# Altium PCB PCB2.PcbDoc (part 3 of 7)
Units mm, origin at the board's own origin, x right, y up, seen from the top; angles counter-clockwise.
Board outline 49 x 45 mm, 6 copper layers (Component Side, GND1, 3.3V, 1.2V, GND2, Solder Side), stack 1.629 mm thick; 56 components, 116 nets, 925 pads, 478 vias.
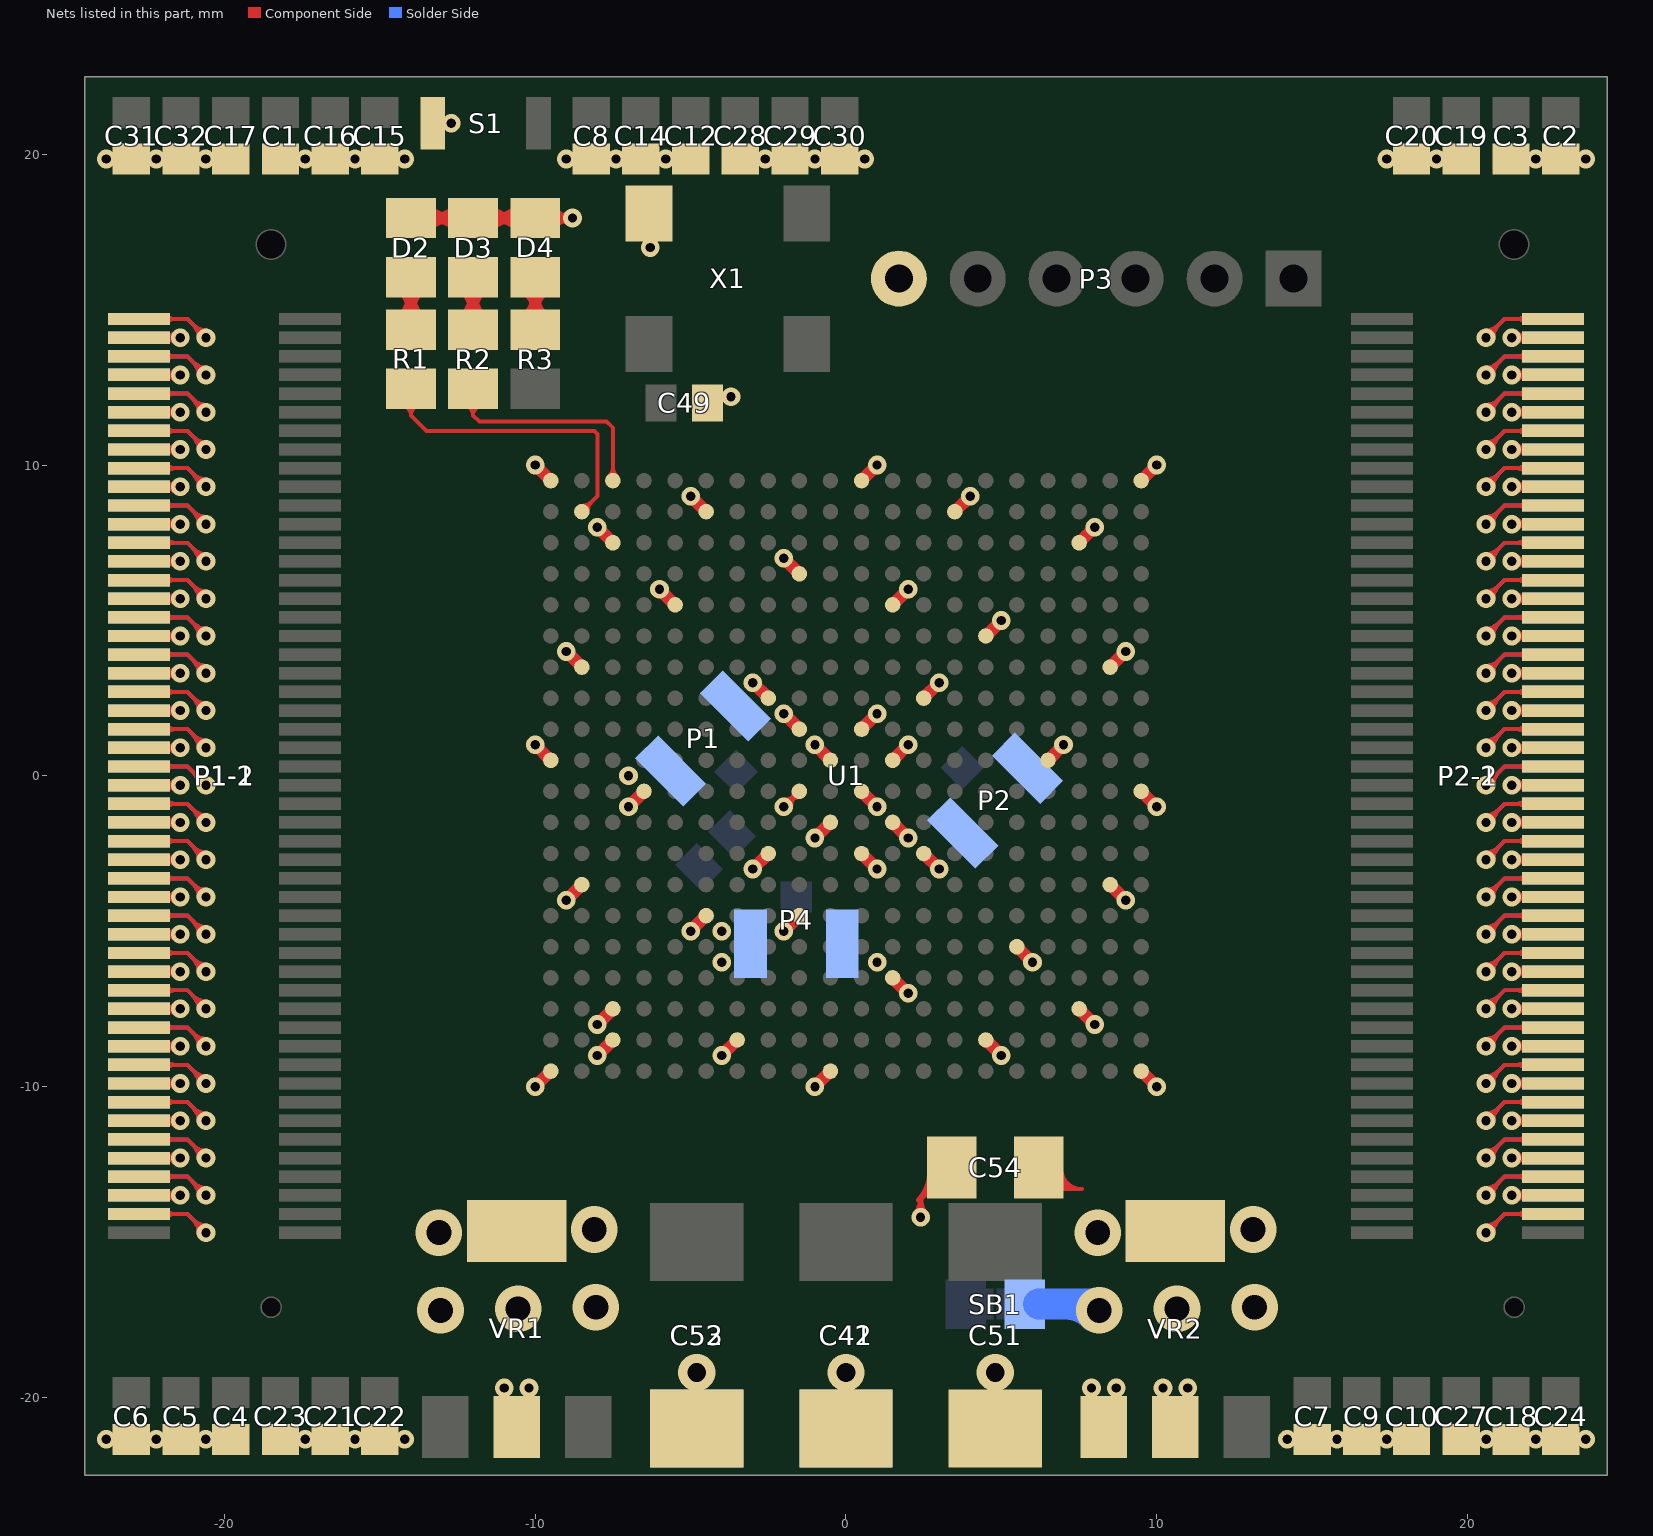
[diagram p7: the nets of this part, all layers, seen from the top]

## Via types
v1: diameter 0.6, hole 0.3, Component Side to Solder Side, tented both sides, 462 vias
v2: diameter 1.5, hole 0.8, Component Side to Solder Side, 10 vias
v3: diameter 1.2, hole 0.6, Component Side to Solder Side, 6 vias

## Nets (pads, with @x,y where several pads share a name; then routed paths per layer and width w, separated by ;. In a path a pad name is that pad's centre, name@x,y a point inside that pad or via, vN(x,y) a via of type N, cw(c..) or ccw(c..) an arc to the next point about the centre after c; other vN are vias at no path point) (continued)
GND: (continued)
  Solder Side w0.127: P1-2.97@-22.85,-14.2 P1-2.97@-22.75,-14.1 ; P1-2.97@-22.8,-14.1 P1-2.97@-22.75,-14.1 ; P1-2.95@-22.8,-13.5 P1-2.95@-22.75,-13.5 ; P1-2.93@-22.8,-12.9 P1-2.93@-22.75,-12.9 ; P1-2.91@-22.8,-12.3 P1-2.91@-22.75,-12.3 ; P1-2.89@-22.8,-11.7 P1-2.89@-22.75,-11.7 ; P1-2.85@-22.8,-10.5 P1-2.85@-22.75,-10.5 ; P1-2.77@-22.8,-8.1 P1-2.77@-22.75,-8.1 -21.196,-8.1 v1(-20.596,-8.7) ; P1-2.73@-22.8,-6.9 P1-2.73@-22.75,-6.9 -21.196,-6.9 v1(-20.596,-7.5) ; P1-2.65@-22.8,-4.5 P1-2.65@-22.75,-4.5 -21.196,-4.5 v1(-20.596,-5.1) ; P1-2.61@-22.8,-3.3 P1-2.61@-22.75,-3.3 -21.196,-3.3 v1(-20.596,-3.9) ; P1-2.53@-22.8,-0.9 P1-2.53@-22.75,-0.9 -21.196,-0.9 v1(-20.596,-1.5) ; P1-2.49@-22.8,0.3 P1-2.49@-22.75,0.3 -21.196,0.3 v1(-20.596,-0.3) ; P1-2.41@-22.8,2.7 P1-2.41@-22.75,2.7 -21.196,2.7 v1(-20.596,2.1) ; P1-2.37@-22.8,3.9 P1-2.37@-22.75,3.9 -21.196,3.9 v1(-20.596,3.3) ; P1-2.29@-22.8,6.3 P1-2.29@-22.75,6.3 -21.196,6.3 v1(-20.596,5.7) ; P1-2.25@-22.8,7.5 P1-2.25@-22.75,7.5 -21.196,7.5 v1(-20.596,6.9) ; P1-2.17@-22.8,9.9 P1-2.17@-22.75,9.9 -21.196,9.9 v1(-20.596,9.3) ; P1-2.13@-22.8,11.1 P1-2.13@-22.75,11.1 -21.196,11.1 v1(-20.596,10.5) ; P1-2.5@-22.8,13.5 P1-2.5@-22.75,13.5 -21.196,13.5 v1(-20.596,12.9) ; P1-2.1@-22.8,14.7 P1-2.1@-22.75,14.7 -21.196,14.7 v1(-20.596,14.1) ; P1-2.85@-22.75,-10.4 P1-2.85@-22.75,-10.5 ; P1-2.83@-22.75,-9.9 v1(-21.423,-9.9) v1@-21.323,-9.9 ; P1-2.81@-22.75,-9.3 -21.196,-9.3 v1(-20.596,-9.9) ; P1-2.79@-22.75,-8.7 v1(-21.423,-8.7) v1@-21.323,-8.7 ; P1-2.75@-22.75,-7.5 v1(-21.423,-7.5) v1@-21.323,-7.5 ; P1-2.71@-22.75,-6.3 v1(-21.423,-6.3) v1@-21.323,-6.3 ; P1-2.69@-22.75,-5.7 -21.196,-5.7 v1(-20.596,-6.3) ; P1-2.67@-22.75,-5.1 v1(-21.423,-5.1) v1@-21.323,-5.1 ; P1-2.63@-22.75,-3.9 v1(-21.423,-3.9) v1@-21.323,-3.9 ; P1-2.59@-22.75,-2.7 v1(-21.423,-2.7) v1@-21.323,-2.7 ; P1-2.57@-22.75,-2.1 -21.196,-2.1 v1(-20.596,-2.7) ; P1-2.55@-22.75,-1.5 v1(-21.423,-1.5) v1@-21.323,-1.5 ; P1-2.51@-22.75,-0.3 v1(-21.423,-0.3) v1@-21.323,-0.3 ; P1-2.47@-22.75,0.9 v1(-21.423,0.9) v1@-21.323,0.9 ; P1-2.45@-22.75,1.5 -21.196,1.5 v1(-20.596,0.9) ; P1-2.43@-22.75,2.1 v1(-21.423,2.1) v1@-21.323,2.1 ; P1-2.39@-22.75,3.3 v1(-21.423,3.3) v1@-21.323,3.3 ; P1-2.35@-22.75,4.5 v1(-21.423,4.5) v1@-21.323,4.5 ; P1-2.33@-22.75,5.1 -21.196,5.1 v1(-20.596,4.5) ; P1-2.31@-22.75,5.7 v1(-21.423,5.7) v1@-21.323,5.7 ; P1-2.27@-22.75,6.9 v1(-21.423,6.9) v1@-21.323,6.9 ; P1-2.23@-22.75,8.1 v1(-21.423,8.1) v1@-21.323,8.1 ; P1-2.21@-22.75,8.7 -21.196,8.7 v1(-20.596,8.1) ; P1-2.19@-22.75,9.3 v1(-21.423,9.3) v1@-21.323,9.3 ; P1-2.15@-22.75,10.5 v1(-21.423,10.5) v1@-21.323,10.5 ; P1-2.11@-22.75,11.7 v1(-21.423,11.7) v1@-21.323,11.7 ; P1-2.9@-22.75,12.3 -21.196,12.3 v1(-20.596,11.7) ; P1-2.7@-22.75,12.9 v1(-21.423,12.9) v1@-21.323,12.9 ; P1-2.3@-22.55,14.1 v1(-21.423,14.1) v1@-21.323,14.1 ; v1(-20.596,-14.7) -21.196,-14.1 P1-2.97@-22.75,-14.1 ; v1(20.596,-14.7) 21.196,-14.1 P2-2.98@22.75,-14.1 ; v1(20.596,-9.9) 21.196,-9.3 P2-2.82@22.75,-9.3 ; v1(20.596,-8.7) 21.196,-8.1 P2-2.78@22.75,-8.1 P2-2.78@22.8,-8.1 ; v1(20.596,-7.5) 21.196,-6.9 P2-2.74@22.75,-6.9 P2-2.74@22.8,-6.9 ; v1(20.596,-6.3) 21.196,-5.7 P2-2.70@22.75,-5.7 ; v1(20.596,-5.1) 21.196,-4.5 P2-2.66@22.75,-4.5 P2-2.66@22.8,-4.5 ; v1(20.596,-3.9) 21.196,-3.3 P2-2.62@22.75,-3.3 P2-2.62@22.8,-3.3 ; v1(20.596,-2.7) 21.196,-2.1 P2-2.58@22.75,-2.1 ; v1(20.596,-1.5) 21.196,-0.9 P2-2.54@22.75,-0.9 P2-2.54@22.8,-0.9 ; v1(20.596,-0.3) 21.196,0.3 P2-2.50@22.75,0.3 P2-2.50@22.8,0.3 ; v1(20.596,0.9) 21.196,1.5 P2-2.46@22.75,1.5 ; v1(20.596,2.1) 21.196,2.7 P2-2.42@22.75,2.7 P2-2.42@22.8,2.7 ; v1(20.596,3.3) 21.196,3.9 P2-2.38@22.75,3.9 P2-2.38@22.8,3.9 ; v1(20.596,4.5) 21.196,5.1 P2-2.34@22.75,5.1 ; v1(20.596,5.7) 21.196,6.3 P2-2.30@22.75,6.3 P2-2.30@22.8,6.3 ; v1(20.596,6.9) 21.196,7.5 P2-2.26@22.75,7.5 P2-2.26@22.8,7.5 ; v1(20.596,8.1) 21.196,8.7 P2-2.22@22.75,8.7 ; v1(20.596,9.3) 21.196,9.9 P2-2.18@22.75,9.9 P2-2.18@22.8,9.9 ; v1(20.596,10.5) 21.196,11.1 P2-2.14@22.75,11.1 P2-2.14@22.8,11.1 ; v1(20.596,11.7) 21.196,12.3 P2-2.10@22.75,12.3 ; v1(20.596,12.9) 21.196,13.5 P2-2.6@22.75,13.5 P2-2.6@22.8,13.5 ; v1(20.596,14.1) 21.196,14.7 P2-2.2@22.75,14.7 ; v1@21.323,-13.5 v1(21.423,-13.5) P2-2.96@22.75,-13.5 ; v1@21.323,-12.3 v1(21.423,-12.3) P2-2.92@22.75,-12.3 ; v1@21.323,-11.1 v1(21.423,-11.1) P2-2.88@22.75,-11.1 ; v1@21.323,-9.9 v1(21.423,-9.9) P2-2.84@22.75,-9.9 ; v1@21.323,-8.7 v1(21.423,-8.7) P2-2.80@22.75,-8.7 ; v1@21.323,-7.5 v1(21.423,-7.5) P2-2.76@22.75,-7.5 ; v1@21.323,-6.3 v1(21.423,-6.3) P2-2.72@22.75,-6.3 ; v1@21.323,-5.1 v1(21.423,-5.1) P2-2.68@22.75,-5.1 ; v1@21.323,-3.9 v1(21.423,-3.9) P2-2.64@22.75,-3.9 ; v1@21.323,-2.7 v1(21.423,-2.7) P2-2.60@22.75,-2.7 ; v1@21.323,-1.5 v1(21.423,-1.5) P2-2.56@22.75,-1.5 ; v1@21.323,-0.3 v1(21.423,-0.3) P2-2.52@22.75,-0.3 ; v1@21.323,0.9 v1(21.423,0.9) P2-2.48@22.75,0.9 ; v1@21.323,2.1 v1(21.423,2.1) P2-2.44@22.75,2.1 ; v1@21.323,3.3 v1(21.423,3.3) P2-2.40@22.75,3.3 ; v1@21.323,4.5 v1(21.423,4.5) P2-2.36@22.75,4.5 ; v1@21.323,5.7 v1(21.423,5.7) P2-2.32@22.75,5.7 ; v1@21.323,6.9 v1(21.423,6.9) P2-2.28@22.75,6.9 ; v1@21.323,8.1 v1(21.423,8.1) P2-2.24@22.75,8.1 ; v1@21.323,9.3 v1(21.423,9.3) P2-2.20@22.75,9.3 ; v1@21.323,10.5 v1(21.423,10.5) P2-2.16@22.75,10.5 ; v1@21.323,11.7 v1(21.423,11.7) P2-2.12@22.75,11.7 ; v1(21.423,12.9) P2-2.8@22.75,12.9 ; v1(21.423,14.1) P2-2.4@22.75,14.1 ; P2-2.86@22.75,-10.4 P2-2.86@22.75,-10.5 ; P2-2.98@22.8,-14.1 P2-2.98@22.75,-14.1 ; P2-2.94@22.8,-12.9 P2-2.94@22.75,-12.9 ; P2-2.90@22.8,-11.7 P2-2.90@22.75,-11.7 ; P2-2.98@22.85,-14.2 P2-2.98@22.75,-14.1 ; P1-2.95@-22.75,-13.5 v1(-21.423,-13.5) ; P1-2.95@-22.75,-13.5 v1(-21.423,-13.5) ; P1-2.93@-22.75,-12.9 -21.196,-12.9 ; P1-2.93@-22.75,-12.9 -21.196,-12.9 ; P1-2.91@-22.75,-12.3 v1(-21.423,-12.3) ; P1-2.91@-22.75,-12.3 v1(-21.423,-12.3) ; P1-2.89@-22.75,-11.7 -21.196,-11.7 ; P1-2.89@-22.75,-11.7 -21.196,-11.7 ; P1-2.85@-22.75,-10.5 -21.196,-10.5 ; P1-2.95@-21.994,-13.5 ccw(c-21.994,-12.929) v1@-21.59,-13.333 ; P1-2.95@-21.994,-13.5 cw(c-21.994,-14.071) v1@-21.59,-13.667 ; P1-2.95@-21.994,-13.5 ccw(c-21.994,-12.929) v1@-21.59,-13.333 ; P1-2.95@-21.994,-13.5 cw(c-21.994,-14.071) v1@-21.59,-13.667 ; P1-2.95@-21.994,-13.5 ccw(c-21.994,-12.929) v1@-21.59,-13.333 ; P1-2.95@-21.994,-13.5 cw(c-21.994,-14.071) v1@-21.59,-13.667 ; P1-2.95@-21.994,-13.5 ccw(c-21.994,-12.929) v1@-21.59,-13.333 ; P1-2.95@-21.994,-13.5 cw(c-21.994,-14.071) v1@-21.59,-13.667 ; P1-2.91@-21.994,-12.3 ccw(c-21.994,-11.729) v1@-21.59,-12.133 ; P1-2.91@-21.994,-12.3 cw(c-21.994,-12.871) v1@-21.59,-12.467 ; P1-2.91@-21.994,-12.3 ccw(c-21.994,-11.729) v1@-21.59,-12.133 ; P1-2.91@-21.994,-12.3 cw(c-21.994,-12.871) v1@-21.59,-12.467 ; P1-2.91@-21.994,-12.3 ccw(c-21.994,-11.729) v1@-21.59,-12.133 ; P1-2.91@-21.994,-12.3 cw(c-21.994,-12.871) v1@-21.59,-12.467 ; P1-2.91@-21.994,-12.3 ccw(c-21.994,-11.729) v1@-21.59,-12.133 ; P1-2.91@-21.994,-12.3 cw(c-21.994,-12.871) v1@-21.59,-12.467 ; P1-2.87@-21.994,-11.1 ccw(c-21.994,-10.529) v1@-21.59,-10.933 ; P1-2.87@-21.994,-11.1 cw(c-21.994,-11.671) v1@-21.59,-11.267 ; P1-2.87@-21.994,-11.1 ccw(c-21.994,-10.529) v1@-21.59,-10.933 ; P1-2.87@-21.994,-11.1 cw(c-21.994,-11.671) v1@-21.59,-11.267 ; P1-2.87@-21.994,-11.1 ccw(c-21.994,-10.529) v1@-21.59,-10.933 ; P1-2.87@-21.994,-11.1 cw(c-21.994,-11.671) v1@-21.59,-11.267 ; P1-2.87@-21.994,-11.1 ccw(c-21.994,-10.529) v1@-21.59,-10.933 ; P1-2.87@-21.994,-11.1 cw(c-21.994,-11.671) v1@-21.59,-11.267 ; P1-2.83@-21.994,-9.9 ccw(c-21.994,-9.329) -21.59,-9.733 cw(c-21.994,-9.329) P1-2.83@-21.994,-9.9 ; P1-2.83@-21.994,-9.9 cw(c-21.994,-10.471) -21.59,-10.067 ccw(c-21.994,-10.471) P1-2.83@-21.994,-9.9 ; P1-2.79@-21.994,-8.7 ccw(c-21.994,-8.129) -21.59,-8.533 cw(c-21.994,-8.129) P1-2.79@-21.994,-8.7 ; P1-2.79@-21.994,-8.7 cw(c-21.994,-9.271) -21.59,-8.867 ccw(c-21.994,-9.271) P1-2.79@-21.994,-8.7 ; P1-2.75@-21.994,-7.5 ccw(c-21.994,-6.929) -21.59,-7.333 cw(c-21.994,-6.929) P1-2.75@-21.994,-7.5 ; P1-2.75@-21.994,-7.5 cw(c-21.994,-8.071) -21.59,-7.667 ccw(c-21.994,-8.071) P1-2.75@-21.994,-7.5 ; P1-2.71@-21.994,-6.3 ccw(c-21.994,-5.729) -21.59,-6.133 cw(c-21.994,-5.729) P1-2.71@-21.994,-6.3 ; P1-2.71@-21.994,-6.3 cw(c-21.994,-6.871) -21.59,-6.467 ccw(c-21.994,-6.871) P1-2.71@-21.994,-6.3 ; P1-2.67@-21.994,-5.1 ccw(c-21.994,-4.529) -21.59,-4.933 cw(c-21.994,-4.529) P1-2.67@-21.994,-5.1 ; P1-2.67@-21.994,-5.1 cw(c-21.994,-5.671) -21.59,-5.267 ccw(c-21.994,-5.671) P1-2.67@-21.994,-5.1 ; P1-2.63@-21.994,-3.9 ccw(c-21.994,-3.329) -21.59,-3.733 cw(c-21.994,-3.329) P1-2.63@-21.994,-3.9 ; P1-2.63@-21.994,-3.9 cw(c-21.994,-4.471) -21.59,-4.067 ccw(c-21.994,-4.471) P1-2.63@-21.994,-3.9 ; P1-2.59@-21.994,-2.7 ccw(c-21.994,-2.129) -21.59,-2.533 cw(c-21.994,-2.129) P1-2.59@-21.994,-2.7 ; P1-2.59@-21.994,-2.7 cw(c-21.994,-3.271) -21.59,-2.867 ccw(c-21.994,-3.271) P1-2.59@-21.994,-2.7 ; P1-2.55@-21.994,-1.5 ccw(c-21.994,-0.929) -21.59,-1.333 cw(c-21.994,-0.929) P1-2.55@-21.994,-1.5 ; P1-2.55@-21.994,-1.5 cw(c-21.994,-2.071) -21.59,-1.667 ccw(c-21.994,-2.071) P1-2.55@-21.994,-1.5 ; P1-2.51@-21.994,-0.3 ccw(c-21.994,0.271) -21.59,-0.133 cw(c-21.994,0.271) P1-2.51@-21.994,-0.3 ; P1-2.51@-21.994,-0.3 cw(c-21.994,-0.871) -21.59,-0.467 ccw(c-21.994,-0.871) P1-2.51@-21.994,-0.3 ; P1-2.47@-21.994,0.9 ccw(c-21.994,1.471) -21.59,1.067 cw(c-21.994,1.471) P1-2.47@-21.994,0.9 ; P1-2.47@-21.994,0.9 cw(c-21.994,0.329) -21.59,0.733 ccw(c-21.994,0.329) P1-2.47@-21.994,0.9 ; P1-2.43@-21.994,2.1 ccw(c-21.994,2.671) -21.59,2.267 cw(c-21.994,2.671) P1-2.43@-21.994,2.1 ; P1-2.43@-21.994,2.1 cw(c-21.994,1.529) -21.59,1.933 ccw(c-21.994,1.529) P1-2.43@-21.994,2.1 ; P1-2.39@-21.994,3.3 ccw(c-21.994,3.871) -21.59,3.467 cw(c-21.994,3.871) P1-2.39@-21.994,3.3 ; P1-2.39@-21.994,3.3 cw(c-21.994,2.729) -21.59,3.133 ccw(c-21.994,2.729) P1-2.39@-21.994,3.3 ; P1-2.35@-21.994,4.5 ccw(c-21.994,5.071) -21.59,4.667 cw(c-21.994,5.071) P1-2.35@-21.994,4.5 ; P1-2.35@-21.994,4.5 cw(c-21.994,3.929) -21.59,4.333 ccw(c-21.994,3.929) P1-2.35@-21.994,4.5 ; P1-2.31@-21.994,5.7 ccw(c-21.994,6.271) -21.59,5.867 cw(c-21.994,6.271) P1-2.31@-21.994,5.7 ; P1-2.31@-21.994,5.7 cw(c-21.994,5.129) -21.59,5.533 ccw(c-21.994,5.129) P1-2.31@-21.994,5.7 ; P1-2.27@-21.994,6.9 ccw(c-21.994,7.471) -21.59,7.067 cw(c-21.994,7.471) P1-2.27@-21.994,6.9 ; P1-2.27@-21.994,6.9 cw(c-21.994,6.329) -21.59,6.733 ccw(c-21.994,6.329) P1-2.27@-21.994,6.9 ; P1-2.23@-21.994,8.1 ccw(c-21.994,8.671) -21.59,8.267 cw(c-21.994,8.671) P1-2.23@-21.994,8.1 ; P1-2.23@-21.994,8.1 cw(c-21.994,7.529) -21.59,7.933 ccw(c-21.994,7.529) P1-2.23@-21.994,8.1 ; P1-2.19@-21.994,9.3 ccw(c-21.994,9.871) -21.59,9.467 cw(c-21.994,9.871) P1-2.19@-21.994,9.3 ; P1-2.19@-21.994,9.3 cw(c-21.994,8.729) -21.59,9.133 ccw(c-21.994,8.729) P1-2.19@-21.994,9.3 ; P1-2.15@-21.994,10.5 ccw(c-21.994,11.071) -21.59,10.667 cw(c-21.994,11.071) P1-2.15@-21.994,10.5 ; P1-2.15@-21.994,10.5 cw(c-21.994,9.929) -21.59,10.333 ccw(c-21.994,9.929) P1-2.15@-21.994,10.5 ; P1-2.11@-21.994,11.7 ccw(c-21.994,12.271) -21.59,11.867 cw(c-21.994,12.271) P1-2.11@-21.994,11.7 ; P1-2.11@-21.994,11.7 cw(c-21.994,11.129) -21.59,11.533 ccw(c-21.994,11.129) P1-2.11@-21.994,11.7 ; P1-2.7@-21.994,12.9 ccw(c-21.994,13.471) -21.59,13.067 cw(c-21.994,13.471) P1-2.7@-21.994,12.9 ; P1-2.7@-21.994,12.9 cw(c-21.994,12.329) -21.59,12.733 ccw(c-21.994,12.329) P1-2.7@-21.994,12.9 ; P1-2.3@-21.994,14.1 ccw(c-21.994,14.671) -21.59,14.267 cw(c-21.994,14.671) P1-2.3@-21.994,14.1 ; P1-2.3@-21.994,14.1 cw(c-21.994,13.529) -21.59,13.933 ccw(c-21.994,13.529) P1-2.3@-21.994,14.1 ; P1-2.95@-21.853,-13.597 cw(c-21.62,-13.83) v1@-21.62,-13.5 ; P1-2.95@-21.853,-13.597 cw(c-21.62,-13.83) v1@-21.62,-13.5 ; P1-2.95@-21.853,-13.597 cw(c-21.62,-13.83) v1@-21.62,-13.5 ; P1-2.95@-21.853,-13.597 cw(c-21.62,-13.83) v1@-21.62,-13.5 ; P1-2.95@-21.853,-13.403 ccw(c-21.62,-13.17) v1@-21.62,-13.5 ; P1-2.95@-21.853,-13.403 ccw(c-21.62,-13.17) v1@-21.62,-13.5 ; P1-2.95@-21.853,-13.403 ccw(c-21.62,-13.17) v1@-21.62,-13.5 ; P1-2.95@-21.853,-13.403 ccw(c-21.62,-13.17) v1@-21.62,-13.5 ; P1-2.93@-21.853,-12.997 cw(c-21.62,-13.23) -21.62,-12.9 ; P1-2.93@-21.853,-12.997 cw(c-21.62,-13.23) -21.62,-12.9 ; P1-2.93@-21.853,-12.997 cw(c-21.62,-13.23) -21.62,-12.9 ; P1-2.93@-21.853,-12.997 cw(c-21.62,-13.23) -21.62,-12.9 ; P1-2.93@-21.853,-12.803 ccw(c-21.62,-12.57) -21.62,-12.9 ; P1-2.93@-21.853,-12.803 ccw(c-21.62,-12.57) -21.62,-12.9 ; P1-2.93@-21.853,-12.803 ccw(c-21.62,-12.57) -21.62,-12.9 ; P1-2.93@-21.853,-12.803 ccw(c-21.62,-12.57) -21.62,-12.9 ; P1-2.91@-21.853,-12.397 cw(c-21.62,-12.63) v1@-21.62,-12.3 ; P1-2.91@-21.853,-12.397 cw(c-21.62,-12.63) v1@-21.62,-12.3 ; P1-2.91@-21.853,-12.397 cw(c-21.62,-12.63) v1@-21.62,-12.3 ; P1-2.91@-21.853,-12.397 cw(c-21.62,-12.63) v1@-21.62,-12.3 ; P1-2.91@-21.853,-12.203 ccw(c-21.62,-11.97) v1@-21.62,-12.3 ; P1-2.91@-21.853,-12.203 ccw(c-21.62,-11.97) v1@-21.62,-12.3 ; P1-2.91@-21.853,-12.203 ccw(c-21.62,-11.97) v1@-21.62,-12.3 ; P1-2.91@-21.853,-12.203 ccw(c-21.62,-11.97) v1@-21.62,-12.3 ; P1-2.89@-21.853,-11.797 cw(c-21.62,-12.03) -21.62,-11.7 ; P1-2.89@-21.853,-11.797 cw(c-21.62,-12.03) -21.62,-11.7 ; P1-2.89@-21.853,-11.797 cw(c-21.62,-12.03) -21.62,-11.7 ; P1-2.89@-21.853,-11.797 cw(c-21.62,-12.03) -21.62,-11.7 ; P1-2.89@-21.853,-11.603 ccw(c-21.62,-11.37) -21.62,-11.7 ; P1-2.89@-21.853,-11.603 ccw(c-21.62,-11.37) -21.62,-11.7 ; P1-2.89@-21.853,-11.603 ccw(c-21.62,-11.37) -21.62,-11.7 ; P1-2.89@-21.853,-11.603 ccw(c-21.62,-11.37) -21.62,-11.7 ; P1-2.87@-21.853,-11.197 cw(c-21.62,-11.43) v1@-21.62,-11.1 ; P1-2.87@-21.853,-11.197 cw(c-21.62,-11.43) v1@-21.62,-11.1 ; P1-2.87@-21.853,-11.197 cw(c-21.62,-11.43) v1@-21.62,-11.1 ; P1-2.87@-21.853,-11.197 cw(c-21.62,-11.43) v1@-21.62,-11.1 ; P1-2.87@-21.853,-11.003 ccw(c-21.62,-10.77) v1@-21.62,-11.1 ; P1-2.87@-21.853,-11.003 ccw(c-21.62,-10.77) v1@-21.62,-11.1 ; P1-2.87@-21.853,-11.003 ccw(c-21.62,-10.77) v1@-21.62,-11.1 ; P1-2.87@-21.853,-11.003 ccw(c-21.62,-10.77) v1@-21.62,-11.1 ; -21.62,-14.1 ccw(c-21.62,-14.43) -21.853,-14.197 cw(c-21.62,-14.43) -21.62,-14.1 ; -21.62,-14.1 cw(c-21.62,-13.77) -21.853,-14.003 ccw(c-21.62,-13.77) -21.62,-14.1 ; -21.62,-10.5 ccw(c-21.62,-10.83) -21.853,-10.597 cw(c-21.62,-10.83) -21.62,-10.5 ; -21.62,-10.5 cw(c-21.62,-10.17) -21.853,-10.403 ccw(c-21.62,-10.17) -21.62,-10.5 ; v1@-21.62,-9.9 ccw(c-21.62,-10.23) -21.853,-9.997 cw(c-21.62,-10.23) v1@-21.62,-9.9 ; v1@-21.62,-9.9 cw(c-21.62,-9.57) -21.853,-9.803 ccw(c-21.62,-9.57) v1@-21.62,-9.9 ; -21.62,-9.3 ccw(c-21.62,-9.63) -21.853,-9.397 cw(c-21.62,-9.63) -21.62,-9.3 ; -21.62,-9.3 cw(c-21.62,-8.97) -21.853,-9.203 ccw(c-21.62,-8.97) -21.62,-9.3 ; v1@-21.62,-8.7 ccw(c-21.62,-9.03) -21.853,-8.797 cw(c-21.62,-9.03) v1@-21.62,-8.7 ; v1@-21.62,-8.7 cw(c-21.62,-8.37) -21.853,-8.603 ccw(c-21.62,-8.37) v1@-21.62,-8.7 ; -21.62,-8.1 ccw(c-21.62,-8.43) -21.853,-8.197 cw(c-21.62,-8.43) -21.62,-8.1 ; -21.62,-8.1 cw(c-21.62,-7.77) -21.853,-8.003 ccw(c-21.62,-7.77) -21.62,-8.1 ; v1@-21.62,-7.5 ccw(c-21.62,-7.83) -21.853,-7.597 cw(c-21.62,-7.83) v1@-21.62,-7.5 ; v1@-21.62,-7.5 cw(c-21.62,-7.17) -21.853,-7.403 ccw(c-21.62,-7.17) v1@-21.62,-7.5 ; -21.62,-6.9 ccw(c-21.62,-7.23) -21.853,-6.997 cw(c-21.62,-7.23) -21.62,-6.9 ; -21.62,-6.9 cw(c-21.62,-6.57) -21.853,-6.803 ccw(c-21.62,-6.57) -21.62,-6.9 ; v1@-21.62,-6.3 ccw(c-21.62,-6.63) -21.853,-6.397 cw(c-21.62,-6.63) v1@-21.62,-6.3 ; v1@-21.62,-6.3 cw(c-21.62,-5.97) -21.853,-6.203 ccw(c-21.62,-5.97) v1@-21.62,-6.3 ; -21.62,-5.7 ccw(c-21.62,-6.03) -21.853,-5.797 cw(c-21.62,-6.03) -21.62,-5.7 ; -21.62,-5.7 cw(c-21.62,-5.37) -21.853,-5.603 ccw(c-21.62,-5.37) -21.62,-5.7 ; v1@-21.62,-5.1 ccw(c-21.62,-5.43) -21.853,-5.197 cw(c-21.62,-5.43) v1@-21.62,-5.1 ; v1@-21.62,-5.1 cw(c-21.62,-4.77) -21.853,-5.003 ccw(c-21.62,-4.77) v1@-21.62,-5.1 ; -21.62,-4.5 ccw(c-21.62,-4.83) -21.853,-4.597 cw(c-21.62,-4.83) -21.62,-4.5 ; -21.62,-4.5 cw(c-21.62,-4.17) -21.853,-4.403 ccw(c-21.62,-4.17) -21.62,-4.5 ; v1@-21.62,-3.9 ccw(c-21.62,-4.23) -21.853,-3.997 cw(c-21.62,-4.23) v1@-21.62,-3.9 ; v1@-21.62,-3.9 cw(c-21.62,-3.57) -21.853,-3.803 ccw(c-21.62,-3.57) v1@-21.62,-3.9 ; -21.62,-3.3 ccw(c-21.62,-3.63) -21.853,-3.397 cw(c-21.62,-3.63) -21.62,-3.3 ; -21.62,-3.3 cw(c-21.62,-2.97) -21.853,-3.203 ccw(c-21.62,-2.97) -21.62,-3.3 ; v1@-21.62,-2.7 ccw(c-21.62,-3.03) -21.853,-2.797 cw(c-21.62,-3.03) v1@-21.62,-2.7 ; v1@-21.62,-2.7 cw(c-21.62,-2.37) -21.853,-2.603 ccw(c-21.62,-2.37) v1@-21.62,-2.7 ; -21.62,-2.1 ccw(c-21.62,-2.43) -21.853,-2.197 cw(c-21.62,-2.43) -21.62,-2.1 ; -21.62,-2.1 cw(c-21.62,-1.77) -21.853,-2.003 ccw(c-21.62,-1.77) -21.62,-2.1 ; v1@-21.62,-1.5 ccw(c-21.62,-1.83) -21.853,-1.597 cw(c-21.62,-1.83) v1@-21.62,-1.5 ; v1@-21.62,-1.5 cw(c-21.62,-1.17) -21.853,-1.403 ccw(c-21.62,-1.17) v1@-21.62,-1.5 ; -21.62,-0.9 ccw(c-21.62,-1.23) -21.853,-0.997 cw(c-21.62,-1.23) -21.62,-0.9 ; -21.62,-0.9 cw(c-21.62,-0.57) -21.853,-0.803 ccw(c-21.62,-0.57) -21.62,-0.9 ; v1@-21.62,-0.3 ccw(c-21.62,-0.63) -21.853,-0.397 cw(c-21.62,-0.63) v1@-21.62,-0.3 ; v1@-21.62,-0.3 cw(c-21.62,0.03) -21.853,-0.203 ccw(c-21.62,0.03) v1@-21.62,-0.3 ; -21.62,0.3 ccw(c-21.62,-0.03) -21.853,0.203 cw(c-21.62,-0.03) -21.62,0.3 ; -21.62,0.3 cw(c-21.62,0.63) -21.853,0.397 ccw(c-21.62,0.63) -21.62,0.3 ; v1@-21.62,0.9 ccw(c-21.62,0.57) -21.853,0.803 cw(c-21.62,0.57) v1@-21.62,0.9 ; v1@-21.62,0.9 cw(c-21.62,1.23) -21.853,0.997 ccw(c-21.62,1.23) v1@-21.62,0.9 ; -21.62,1.5 ccw(c-21.62,1.17) -21.853,1.403 cw(c-21.62,1.17) -21.62,1.5 ; -21.62,1.5 cw(c-21.62,1.83) -21.853,1.597 ccw(c-21.62,1.83) -21.62,1.5 ; v1@-21.62,2.1 ccw(c-21.62,1.77) -21.853,2.003 cw(c-21.62,1.77) v1@-21.62,2.1 ; v1@-21.62,2.1 cw(c-21.62,2.43) -21.853,2.197 ccw(c-21.62,2.43) v1@-21.62,2.1 ; -21.62,2.7 ccw(c-21.62,2.37) -21.853,2.603 cw(c-21.62,2.37) -21.62,2.7 ; -21.62,2.7 cw(c-21.62,3.03) -21.853,2.797 ccw(c-21.62,3.03) -21.62,2.7 ; v1@-21.62,3.3 ccw(c-21.62,2.97) -21.853,3.203 cw(c-21.62,2.97) v1@-21.62,3.3 ; v1@-21.62,3.3 cw(c-21.62,3.63) -21.853,3.397 ccw(c-21.62,3.63) v1@-21.62,3.3 ; -21.62,3.9 ccw(c-21.62,3.57) -21.853,3.803 cw(c-21.62,3.57) -21.62,3.9 ; -21.62,3.9 cw(c-21.62,4.23) -21.853,3.997 ccw(c-21.62,4.23) -21.62,3.9 ; v1@-21.62,4.5 ccw(c-21.62,4.17) -21.853,4.403 cw(c-21.62,4.17) v1@-21.62,4.5 ; v1@-21.62,4.5 cw(c-21.62,4.83) -21.853,4.597 ccw(c-21.62,4.83) v1@-21.62,4.5 ; -21.62,5.1 ccw(c-21.62,4.77) -21.853,5.003 cw(c-21.62,4.77) -21.62,5.1 ; -21.62,5.1 cw(c-21.62,5.43) -21.853,5.197 ccw(c-21.62,5.43) -21.62,5.1 ; v1@-21.62,5.7 ccw(c-21.62,5.37) -21.853,5.603 cw(c-21.62,5.37) v1@-21.62,5.7 ; v1@-21.62,5.7 cw(c-21.62,6.03) -21.853,5.797 ccw(c-21.62,6.03) v1@-21.62,5.7 ; -21.62,6.3 ccw(c-21.62,5.97) -21.853,6.203 cw(c-21.62,5.97) -21.62,6.3 ; -21.62,6.3 cw(c-21.62,6.63) -21.853,6.397 ccw(c-21.62,6.63) -21.62,6.3 ; v1@-21.62,6.9 ccw(c-21.62,6.57) -21.853,6.803 cw(c-21.62,6.57) v1@-21.62,6.9 ; v1@-21.62,6.9 cw(c-21.62,7.23) -21.853,6.997 ccw(c-21.62,7.23) v1@-21.62,6.9 ; -21.62,7.5 ccw(c-21.62,7.17) -21.853,7.403 cw(c-21.62,7.17) -21.62,7.5 ; -21.62,7.5 cw(c-21.62,7.83) -21.853,7.597 ccw(c-21.62,7.83) -21.62,7.5 ; v1@-21.62,8.1 ccw(c-21.62,7.77) -21.853,8.003 cw(c-21.62,7.77) v1@-21.62,8.1 ; v1@-21.62,8.1 cw(c-21.62,8.43) -21.853,8.197 ccw(c-21.62,8.43) v1@-21.62,8.1 ; -21.62,8.7 ccw(c-21.62,8.37) -21.853,8.603 cw(c-21.62,8.37) -21.62,8.7 ; -21.62,8.7 cw(c-21.62,9.03) -21.853,8.797 ccw(c-21.62,9.03) -21.62,8.7 ; v1@-21.62,9.3 ccw(c-21.62,8.97) -21.853,9.203 cw(c-21.62,8.97) v1@-21.62,9.3 ; v1@-21.62,9.3 cw(c-21.62,9.63) -21.853,9.397 ccw(c-21.62,9.63) v1@-21.62,9.3 ; -21.62,9.9 ccw(c-21.62,9.57) -21.853,9.803 cw(c-21.62,9.57) -21.62,9.9 ; -21.62,9.9 cw(c-21.62,10.23) -21.853,9.997 ccw(c-21.62,10.23) -21.62,9.9 ; v1@-21.62,10.5 ccw(c-21.62,10.17) -21.853,10.403 cw(c-21.62,10.17) v1@-21.62,10.5 ; v1@-21.62,10.5 cw(c-21.62,10.83) -21.853,10.597 ccw(c-21.62,10.83) v1@-21.62,10.5 ; -21.62,11.1 ccw(c-21.62,10.77) -21.853,11.003 cw(c-21.62,10.77) -21.62,11.1 ; -21.62,11.1 cw(c-21.62,11.43) -21.853,11.197 ccw(c-21.62,11.43) -21.62,11.1 ; v1@-21.62,11.7 ccw(c-21.62,11.37) -21.853,11.603 cw(c-21.62,11.37) v1@-21.62,11.7 ; v1@-21.62,11.7 cw(c-21.62,12.03) -21.853,11.797 ccw(c-21.62,12.03) v1@-21.62,11.7 ; -21.62,12.3 ccw(c-21.62,11.97) -21.853,12.203 cw(c-21.62,11.97) -21.62,12.3 ; -21.62,12.3 cw(c-21.62,12.63) -21.853,12.397 ccw(c-21.62,12.63) -21.62,12.3 ; v1@-21.62,12.9 ccw(c-21.62,12.57) -21.853,12.803 cw(c-21.62,12.57) v1@-21.62,12.9 ; v1@-21.62,12.9 cw(c-21.62,13.23) -21.853,12.997 ccw(c-21.62,13.23) v1@-21.62,12.9 ; -21.62,13.5 ccw(c-21.62,13.17) -21.853,13.403 cw(c-21.62,13.17) -21.62,13.5 ; -21.62,13.5 cw(c-21.62,13.83) -21.853,13.597 ccw(c-21.62,13.83) -21.62,13.5 ; v1@-21.62,14.1 ccw(c-21.62,13.77) -21.853,14.003 cw(c-21.62,13.77) v1@-21.62,14.1 ; v1@-21.62,14.1 cw(c-21.62,14.43) -21.853,14.197 ccw(c-21.62,14.43) v1@-21.62,14.1 ; -21.62,14.7 ccw(c-21.62,14.37) -21.853,14.603 cw(c-21.62,14.37) -21.62,14.7 ; -21.62,14.7 cw(c-21.62,15.03) -21.853,14.797 ccw(c-21.62,15.03) -21.62,14.7 ; v1(-21.423,-13.5) -21.323,-13.5 v1(-21.423,-13.5) ; v1(-21.423,-12.3) -21.323,-12.3 v1(-21.423,-12.3) ; v1(-21.423,-11.1) -21.323,-11.1 v1(-21.423,-11.1) ; v1(-21.423,-11.1) P1-2.87@-22.75,-11.1 v1(-21.423,-11.1) ; -21.196,-12.9 v1(-20.596,-13.5) -21.196,-12.9 ; -21.196,-11.7 v1(-20.596,-12.3) -21.196,-11.7 ; -21.196,-10.5 v1(-20.596,-11.1) -21.196,-10.5 ; -21,-14.296 ccw(c-20.596,-13.893) -20.596,-14.464 cw(c-20.596,-13.893) -21,-14.296 ; -21,-14.296 cw(c-21.403,-14.7) -20.833,-14.7 ccw(c-21.403,-14.7) -21,-14.296 ; -21,-13.096 ccw(c-20.596,-12.693) v1@-20.596,-13.264 ; -21,-13.096 cw(c-21.403,-13.5) v1@-20.833,-13.5 ; -21,-13.096 ccw(c-20.596,-12.693) v1@-20.596,-13.264 ; -21,-13.096 cw(c-21.403,-13.5) v1@-20.833,-13.5 ; -21,-13.096 ccw(c-20.596,-12.693) v1@-20.596,-13.264 ; -21,-13.096 cw(c-21.403,-13.5) v1@-20.833,-13.5 ; -21,-13.096 ccw(c-20.596,-12.693) v1@-20.596,-13.264 ; -21,-13.096 cw(c-21.403,-13.5) v1@-20.833,-13.5 ; -21,-11.896 ccw(c-20.596,-11.493) v1@-20.596,-12.064 ; -21,-11.896 cw(c-21.403,-12.3) v1@-20.833,-12.3 ; -21,-11.896 ccw(c-20.596,-11.493) v1@-20.596,-12.064 ; -21,-11.896 cw(c-21.403,-12.3) v1@-20.833,-12.3 ; -21,-11.896 ccw(c-20.596,-11.493) v1@-20.596,-12.064 ; -21,-11.896 cw(c-21.403,-12.3) v1@-20.833,-12.3 ; -21,-11.896 ccw(c-20.596,-11.493) v1@-20.596,-12.064 ; -21,-11.896 cw(c-21.403,-12.3) v1@-20.833,-12.3 ; -21,-10.696 ccw(c-20.596,-10.293) v1@-20.596,-10.864 ; -21,-10.696 cw(c-21.403,-11.1) v1@-20.833,-11.1 ; -21,-10.696 ccw(c-20.596,-10.293) v1@-20.596,-10.864 ; -21,-10.696 cw(c-21.403,-11.1) v1@-20.833,-11.1 ; -21,-10.696 ccw(c-20.596,-10.293) v1@-20.596,-10.864 ; -21,-10.696 cw(c-21.403,-11.1) v1@-20.833,-11.1 ; -21,-10.696 ccw(c-20.596,-10.293) v1@-20.596,-10.864 ; -21,-10.696 cw(c-21.403,-11.1) v1@-20.833,-11.1 ; -21,-9.496 ccw(c-20.596,-9.093) -20.596,-9.664 cw(c-20.596,-9.093) -21,-9.496 ; -21,-9.496 cw(c-21.403,-9.9) -20.833,-9.9 ccw(c-21.403,-9.9) -21,-9.496 ; -21,-8.296 ccw(c-20.596,-7.893) -20.596,-8.464 cw(c-20.596,-7.893) -21,-8.296 ; -21,-8.296 cw(c-21.403,-8.7) -20.833,-8.7 ccw(c-21.403,-8.7) -21,-8.296 ; -21,-7.096 ccw(c-20.596,-6.693) -20.596,-7.264 cw(c-20.596,-6.693) -21,-7.096 ; -21,-7.096 cw(c-21.403,-7.5) -20.833,-7.5 ccw(c-21.403,-7.5) -21,-7.096 ; -21,-5.896 ccw(c-20.596,-5.493) -20.596,-6.064 cw(c-20.596,-5.493) -21,-5.896 ; -21,-5.896 cw(c-21.403,-6.3) -20.833,-6.3 ccw(c-21.403,-6.3) -21,-5.896 ; -21,-4.696 ccw(c-20.596,-4.293) -20.596,-4.864 cw(c-20.596,-4.293) -21,-4.696 ; -21,-4.696 cw(c-21.403,-5.1) -20.833,-5.1 ccw(c-21.403,-5.1) -21,-4.696 ; -21,-3.496 ccw(c-20.596,-3.093) -20.596,-3.664 cw(c-20.596,-3.093) -21,-3.496 ; -21,-3.496 cw(c-21.403,-3.9) -20.833,-3.9 ccw(c-21.403,-3.9) -21,-3.496 ; -21,-2.296 ccw(c-20.596,-1.893) -20.596,-2.464 cw(c-20.596,-1.893) -21,-2.296 ; -21,-2.296 cw(c-21.403,-2.7) -20.833,-2.7 ccw(c-21.403,-2.7) -21,-2.296 ; -21,-1.096 ccw(c-20.596,-0.693) -20.596,-1.264 cw(c-20.596,-0.693) -21,-1.096 ; -21,-1.096 cw(c-21.403,-1.5) -20.833,-1.5 ccw(c-21.403,-1.5) -21,-1.096 ; -21,0.104 ccw(c-20.596,0.507) -20.596,-0.064 cw(c-20.596,0.507) -21,0.104 ; -21,0.104 cw(c-21.403,-0.3) -20.833,-0.3 ccw(c-21.403,-0.3) -21,0.104 ; -21,1.304 ccw(c-20.596,1.707) -20.596,1.136 cw(c-20.596,1.707) -21,1.304 ; -21,1.304 cw(c-21.403,0.9) -20.833,0.9 ccw(c-21.403,0.9) -21,1.304 ; -21,2.504 ccw(c-20.596,2.907) -20.596,2.336 cw(c-20.596,2.907) -21,2.504 ; -21,2.504 cw(c-21.403,2.1) -20.833,2.1 ccw(c-21.403,2.1) -21,2.504 ; -21,3.704 ccw(c-20.596,4.107) -20.596,3.536 cw(c-20.596,4.107) -21,3.704 ; -21,3.704 cw(c-21.403,3.3) -20.833,3.3 ccw(c-21.403,3.3) -21,3.704 ; -21,4.904 ccw(c-20.596,5.307) -20.596,4.736 cw(c-20.596,5.307) -21,4.904 ; -21,4.904 cw(c-21.403,4.5) -20.833,4.5 ccw(c-21.403,4.5) -21,4.904 ; -21,6.104 ccw(c-20.596,6.507) -20.596,5.936 cw(c-20.596,6.507) -21,6.104 ; -21,6.104 cw(c-21.403,5.7) -20.833,5.7 ccw(c-21.403,5.7) -21,6.104 ; -21,7.304 ccw(c-20.596,7.707) -20.596,7.136 cw(c-20.596,7.707) -21,7.304 ; -21,7.304 cw(c-21.403,6.9) -20.833,6.9 ccw(c-21.403,6.9) -21,7.304 ; -21,8.504 ccw(c-20.596,8.907) -20.596,8.336 cw(c-20.596,8.907) -21,8.504 ; -21,8.504 cw(c-21.403,8.1) -20.833,8.1 ccw(c-21.403,8.1) -21,8.504 ; -21,9.704 ccw(c-20.596,10.107) -20.596,9.536 cw(c-20.596,10.107) -21,9.704 ; -21,9.704 cw(c-21.403,9.3) -20.833,9.3 ccw(c-21.403,9.3) -21,9.704 ; -21,10.904 ccw(c-20.596,11.307) -20.596,10.736 cw(c-20.596,11.307) -21,10.904 ; -21,10.904 cw(c-21.403,10.5) -20.833,10.5 ccw(c-21.403,10.5) -21,10.904 ; -21,12.104 ccw(c-20.596,12.507) -20.596,11.936 cw(c-20.596,12.507) -21,12.104 ; -21,12.104 cw(c-21.403,11.7) -20.833,11.7 ccw(c-21.403,11.7) -21,12.104 ; -21,13.304 ccw(c-20.596,13.707) -20.596,13.136 cw(c-20.596,13.707) -21,13.304 ; -21,13.304 cw(c-21.403,12.9) -20.833,12.9 ccw(c-21.403,12.9) -21,13.304 ; -21,14.504 ccw(c-20.596,14.907) -20.596,14.336 cw(c-20.596,14.907) -21,14.504 ; -21,14.504 cw(c-21.403,14.1) -20.833,14.1 ccw(c-21.403,14.1) -21,14.504 ; v1@20.596,-13.264 ccw(c20.596,-12.693) 21,-13.096 ; v1@20.596,-13.264 ccw(c20.596,-12.693) 21,-13.096 ; v1@20.596,-13.264 ccw(c20.596,-12.693) 21,-13.096 ; v1@20.596,-13.264 ccw(c20.596,-12.693) 21,-13.096 ; v1@20.596,-12.064 ccw(c20.596,-11.493) 21,-11.896 ; v1@20.596,-12.064 ccw(c20.596,-11.493) 21,-11.896 ; v1@20.596,-12.064 ccw(c20.596,-11.493) 21,-11.896 ; v1@20.596,-12.064 ccw(c20.596,-11.493) 21,-11.896 ; v1@20.596,-10.864 ccw(c20.596,-10.293) 21,-10.696 ; v1@20.596,-10.864 ccw(c20.596,-10.293) 21,-10.696 ; v1@20.596,-10.864 ccw(c20.596,-10.293) 21,-10.696 ; v1@20.596,-10.864 ccw(c20.596,-10.293) 21,-10.696 ; v1@20.833,-13.5 cw(c21.403,-13.5) 21,-13.096 ; v1@20.833,-13.5 cw(c21.403,-13.5) 21,-13.096 ; v1@20.833,-13.5 cw(c21.403,-13.5) 21,-13.096 ; v1@20.833,-13.5 cw(c21.403,-13.5) 21,-13.096 ; v1@20.833,-12.3 cw(c21.403,-12.3) 21,-11.896 ; v1@20.833,-12.3 cw(c21.403,-12.3) 21,-11.896 ; v1@20.833,-12.3 cw(c21.403,-12.3) 21,-11.896 ; v1@20.833,-12.3 cw(c21.403,-12.3) 21,-11.896 ; v1@20.833,-11.1 cw(c21.403,-11.1) 21,-10.696 ; v1@20.833,-11.1 cw(c21.403,-11.1) 21,-10.696 ; v1@20.833,-11.1 cw(c21.403,-11.1) 21,-10.696 ; v1@20.833,-11.1 cw(c21.403,-11.1) 21,-10.696 ; 21,-14.296 ccw(c21.403,-14.7) 20.833,-14.7 cw(c21.403,-14.7) 21,-14.296 ; 21,-14.296 cw(c20.596,-13.893) 20.596,-14.464 ccw(c20.596,-13.893) 21,-14.296 ; 21,-9.496 ccw(c21.403,-9.9) 20.833,-9.9 cw(c21.403,-9.9) 21,-9.496 ; 21,-9.496 cw(c20.596,-9.093) 20.596,-9.664 ccw(c20.596,-9.093) 21,-9.496 ; 21,-8.296 ccw(c21.403,-8.7) 20.833,-8.7 cw(c21.403,-8.7) 21,-8.296 ; 21,-8.296 cw(c20.596,-7.893) 20.596,-8.464 ccw(c20.596,-7.893) 21,-8.296 ; 21,-7.096 ccw(c21.403,-7.5) 20.833,-7.5 cw(c21.403,-7.5) 21,-7.096 ; 21,-7.096 cw(c20.596,-6.693) 20.596,-7.264 ccw(c20.596,-6.693) 21,-7.096 ; 21,-5.896 ccw(c21.403,-6.3) 20.833,-6.3 cw(c21.403,-6.3) 21,-5.896 ; 21,-5.896 cw(c20.596,-5.493) 20.596,-6.064 ccw(c20.596,-5.493) 21,-5.896 ; 21,-4.696 ccw(c21.403,-5.1) 20.833,-5.1 cw(c21.403,-5.1) 21,-4.696 ; 21,-4.696 cw(c20.596,-4.293) 20.596,-4.864 ccw(c20.596,-4.293) 21,-4.696 ; 21,-3.496 ccw(c21.403,-3.9) 20.833,-3.9 cw(c21.403,-3.9) 21,-3.496 ; 21,-3.496 cw(c20.596,-3.093) 20.596,-3.664 ccw(c20.596,-3.093) 21,-3.496 ; 21,-2.296 ccw(c21.403,-2.7) 20.833,-2.7 cw(c21.403,-2.7) 21,-2.296 ; 21,-2.296 cw(c20.596,-1.893) 20.596,-2.464 ccw(c20.596,-1.893) 21,-2.296 ; 21,-1.096 ccw(c21.403,-1.5) 20.833,-1.5 cw(c21.403,-1.5) 21,-1.096 ; 21,-1.096 cw(c20.596,-0.693) 20.596,-1.264 ccw(c20.596,-0.693) 21,-1.096 ; 21,0.104 ccw(c21.403,-0.3) 20.833,-0.3 cw(c21.403,-0.3) 21,0.104 ; 21,0.104 cw(c20.596,0.507) 20.596,-0.064 ccw(c20.596,0.507) 21,0.104 ; 21,1.304 ccw(c21.403,0.9) 20.833,0.9 cw(c21.403,0.9) 21,1.304 ; 21,1.304 cw(c20.596,1.707) 20.596,1.136 ccw(c20.596,1.707) 21,1.304 ; 21,2.504 ccw(c21.403,2.1) 20.833,2.1 cw(c21.403,2.1) 21,2.504 ; 21,2.504 cw(c20.596,2.907) 20.596,2.336 ccw(c20.596,2.907) 21,2.504 ; 21,3.704 ccw(c21.403,3.3) 20.833,3.3 cw(c21.403,3.3) 21,3.704 ; 21,3.704 cw(c20.596,4.107) 20.596,3.536 ccw(c20.596,4.107) 21,3.704 ; 21,4.904 ccw(c21.403,4.5) 20.833,4.5 cw(c21.403,4.5) 21,4.904 ; 21,4.904 cw(c20.596,5.307) 20.596,4.736 ccw(c20.596,5.307) 21,4.904 ; 21,6.104 ccw(c21.403,5.7) 20.833,5.7 cw(c21.403,5.7) 21,6.104 ; 21,6.104 cw(c20.596,6.507) 20.596,5.936 ccw(c20.596,6.507) 21,6.104 ; 21,7.304 ccw(c21.403,6.9) 20.833,6.9 cw(c21.403,6.9) 21,7.304 ; 21,7.304 cw(c20.596,7.707) 20.596,7.136 ccw(c20.596,7.707) 21,7.304 ; 21,8.504 ccw(c21.403,8.1) 20.833,8.1 cw(c21.403,8.1) 21,8.504 ; 21,8.504 cw(c20.596,8.907) 20.596,8.336 ccw(c20.596,8.907) 21,8.504 ; 21,9.704 ccw(c21.403,9.3) 20.833,9.3 cw(c21.403,9.3) 21,9.704 ; 21,9.704 cw(c20.596,10.107) 20.596,9.536 ccw(c20.596,10.107) 21,9.704 ; 21,10.904 ccw(c21.403,10.5) 20.833,10.5 cw(c21.403,10.5) 21,10.904 ; 21,10.904 cw(c20.596,11.307) 20.596,10.736 ccw(c20.596,11.307) 21,10.904 ; 21,12.104 ccw(c21.403,11.7) 20.833,11.7 cw(c21.403,11.7) 21,12.104 ; 21,12.104 cw(c20.596,12.507) 20.596,11.936 ccw(c20.596,12.507) 21,12.104 ; 21,13.304 ccw(c21.403,12.9) 20.833,12.9 cw(c21.403,12.9) 21,13.304 ; 21,13.304 cw(c20.596,13.707) 20.596,13.136 ccw(c20.596,13.707) 21,13.304 ; 21,14.504 ccw(c21.403,14.1) 20.833,14.1 cw(c21.403,14.1) 21,14.504 ; 21,14.504 cw(c20.596,14.907) 20.596,14.336 ccw(c20.596,14.907) 21,14.504 ; 21.196,-12.9 P2-2.94@22.75,-12.9 ; 21.196,-12.9 v1(20.596,-13.5) 21.196,-12.9 ; 21.196,-12.9 P2-2.94@22.75,-12.9 ; 21.196,-11.7 v1(20.596,-12.3) 21.196,-11.7 ; 21.196,-11.7 P2-2.90@22.75,-11.7 ; 21.196,-11.7 P2-2.90@22.75,-11.7 ; 21.196,-10.5 P2-2.86@22.75,-10.5 ; 21.196,-10.5 P2-2.86@22.75,-10.5 ; 21.196,-10.5 v1(20.596,-11.1) 21.196,-10.5 ; 21.62,-14.1 ccw(c21.62,-13.77) 21.853,-14.003 cw(c21.62,-13.77) 21.62,-14.1 ; 21.62,-14.1 cw(c21.62,-14.43) 21.853,-14.197 ccw(c21.62,-14.43) 21.62,-14.1 ; v1@21.62,-13.5 ccw(c21.62,-13.17) 21.853,-13.403 cw(c21.62,-13.17) v1@21.62,-13.5 ; v1@21.62,-13.5 cw(c21.62,-13.83) 21.853,-13.597 ccw(c21.62,-13.83) v1@21.62,-13.5 ; 21.62,-12.9 ccw(c21.62,-12.57) P2-2.94@21.853,-12.803 ; 21.62,-12.9 cw(c21.62,-13.23) P2-2.94@21.853,-12.997 ; 21.62,-12.9 ccw(c21.62,-12.57) P2-2.94@21.853,-12.803 ; 21.62,-12.9 cw(c21.62,-13.23) P2-2.94@21.853,-12.997 ; 21.62,-12.9 ccw(c21.62,-12.57) P2-2.94@21.853,-12.803 ; 21.62,-12.9 cw(c21.62,-13.23) P2-2.94@21.853,-12.997 ; 21.62,-12.9 ccw(c21.62,-12.57) P2-2.94@21.853,-12.803 ; 21.62,-12.9 cw(c21.62,-13.23) P2-2.94@21.853,-12.997 ; v1@21.62,-12.3 ccw(c21.62,-11.97) 21.853,-12.203 cw(c21.62,-11.97) v1@21.62,-12.3 ; v1@21.62,-12.3 cw(c21.62,-12.63) 21.853,-12.397 ccw(c21.62,-12.63) v1@21.62,-12.3 ; 21.62,-11.7 ccw(c21.62,-11.37) P2-2.90@21.853,-11.603 ; 21.62,-11.7 cw(c21.62,-12.03) P2-2.90@21.853,-11.797 ; 21.62,-11.7 ccw(c21.62,-11.37) P2-2.90@21.853,-11.603 ; 21.62,-11.7 cw(c21.62,-12.03) P2-2.90@21.853,-11.797 ; 21.62,-11.7 ccw(c21.62,-11.37) P2-2.90@21.853,-11.603 ; 21.62,-11.7 cw(c21.62,-12.03) P2-2.90@21.853,-11.797 ; 21.62,-11.7 ccw(c21.62,-11.37) P2-2.90@21.853,-11.603 ; 21.62,-11.7 cw(c21.62,-12.03) P2-2.90@21.853,-11.797 ; v1@21.62,-11.1 ccw(c21.62,-10.77) 21.853,-11.003 cw(c21.62,-10.77) v1@21.62,-11.1 ; v1@21.62,-11.1 cw(c21.62,-11.43) 21.853,-11.197 ccw(c21.62,-11.43) v1@21.62,-11.1 ; 21.62,-10.5 ccw(c21.62,-10.17) P2-2.86@21.853,-10.403 ; 21.62,-10.5 cw(c21.62,-10.83) P2-2.86@21.853,-10.597 ; 21.62,-10.5 ccw(c21.62,-10.17) P2-2.86@21.853,-10.403 ; 21.62,-10.5 cw(c21.62,-10.83) P2-2.86@21.853,-10.597 ; 21.62,-10.5 ccw(c21.62,-10.17) P2-2.86@21.853,-10.403 ; 21.62,-10.5 cw(c21.62,-10.83) P2-2.86@21.853,-10.597 ; 21.62,-10.5 ccw(c21.62,-10.17) P2-2.86@21.853,-10.403 ; 21.62,-10.5 cw(c21.62,-10.83) P2-2.86@21.853,-10.597 ; v1@21.62,-9.9 ccw(c21.62,-9.57) 21.853,-9.803 cw(c21.62,-9.57) v1@21.62,-9.9 ; v1@21.62,-9.9 cw(c21.62,-10.23) 21.853,-9.997 ccw(c21.62,-10.23) v1@21.62,-9.9 ; 21.62,-9.3 ccw(c21.62,-8.97) 21.853,-9.203 cw(c21.62,-8.97) 21.62,-9.3 ; 21.62,-9.3 cw(c21.62,-9.63) 21.853,-9.397 ccw(c21.62,-9.63) 21.62,-9.3 ; v1@21.62,-8.7 ccw(c21.62,-8.37) 21.853,-8.603 cw(c21.62,-8.37) v1@21.62,-8.7 ; v1@21.62,-8.7 cw(c21.62,-9.03) 21.853,-8.797 ccw(c21.62,-9.03) v1@21.62,-8.7 ; 21.62,-8.1 ccw(c21.62,-7.77) 21.853,-8.003 cw(c21.62,-7.77) 21.62,-8.1 ; 21.62,-8.1 cw(c21.62,-8.43) 21.853,-8.197 ccw(c21.62,-8.43) 21.62,-8.1 ; v1@21.62,-7.5 ccw(c21.62,-7.17) 21.853,-7.403 cw(c21.62,-7.17) v1@21.62,-7.5 ; v1@21.62,-7.5 cw(c21.62,-7.83) 21.853,-7.597 ccw(c21.62,-7.83) v1@21.62,-7.5 ; 21.62,-6.9 ccw(c21.62,-6.57) 21.853,-6.803 cw(c21.62,-6.57) 21.62,-6.9 ; 21.62,-6.9 cw(c21.62,-7.23) 21.853,-6.997 ccw(c21.62,-7.23) 21.62,-6.9 ; v1@21.62,-6.3 ccw(c21.62,-5.97) 21.853,-6.203 cw(c21.62,-5.97) v1@21.62,-6.3 ; v1@21.62,-6.3 cw(c21.62,-6.63) 21.853,-6.397 ccw(c21.62,-6.63) v1@21.62,-6.3 ; 21.62,-5.7 ccw(c21.62,-5.37) 21.853,-5.603 cw(c21.62,-5.37) 21.62,-5.7 ; 21.62,-5.7 cw(c21.62,-6.03) 21.853,-5.797 ccw(c21.62,-6.03) 21.62,-5.7 ; v1@21.62,-5.1 ccw(c21.62,-4.77) 21.853,-5.003 cw(c21.62,-4.77) v1@21.62,-5.1 ; v1@21.62,-5.1 cw(c21.62,-5.43) 21.853,-5.197 ccw(c21.62,-5.43) v1@21.62,-5.1 ; 21.62,-4.5 ccw(c21.62,-4.17) 21.853,-4.403 cw(c21.62,-4.17) 21.62,-4.5 ; 21.62,-4.5 cw(c21.62,-4.83) 21.853,-4.597 ccw(c21.62,-4.83) 21.62,-4.5 ; v1@21.62,-3.9 ccw(c21.62,-3.57) 21.853,-3.803 cw(c21.62,-3.57) v1@21.62,-3.9 ; v1@21.62,-3.9 cw(c21.62,-4.23) 21.853,-3.997 ccw(c21.62,-4.23) v1@21.62,-3.9 ; 21.62,-3.3 ccw(c21.62,-2.97) 21.853,-3.203 cw(c21.62,-2.97) 21.62,-3.3 ; 21.62,-3.3 cw(c21.62,-3.63) 21.853,-3.397 ccw(c21.62,-3.63) 21.62,-3.3 ; v1@21.62,-2.7 ccw(c21.62,-2.37) 21.853,-2.603 cw(c21.62,-2.37) v1@21.62,-2.7 ; v1@21.62,-2.7 cw(c21.62,-3.03) 21.853,-2.797 ccw(c21.62,-3.03) v1@21.62,-2.7 ; 21.62,-2.1 ccw(c21.62,-1.77) 21.853,-2.003 cw(c21.62,-1.77) 21.62,-2.1 ; 21.62,-2.1 cw(c21.62,-2.43) 21.853,-2.197 ccw(c21.62,-2.43) 21.62,-2.1 ; v1@21.62,-1.5 ccw(c21.62,-1.17) 21.853,-1.403 cw(c21.62,-1.17) v1@21.62,-1.5 ; v1@21.62,-1.5 cw(c21.62,-1.83) 21.853,-1.597 ccw(c21.62,-1.83) v1@21.62,-1.5 ; 21.62,-0.9 ccw(c21.62,-0.57) 21.853,-0.803 cw(c21.62,-0.57) 21.62,-0.9 ; 21.62,-0.9 cw(c21.62,-1.23) 21.853,-0.997 ccw(c21.62,-1.23) 21.62,-0.9 ; v1@21.62,-0.3 ccw(c21.62,0.03) 21.853,-0.203 cw(c21.62,0.03) v1@21.62,-0.3 ; v1@21.62,-0.3 cw(c21.62,-0.63) 21.853,-0.397 ccw(c21.62,-0.63) v1@21.62,-0.3 ; 21.62,0.3 ccw(c21.62,0.63) 21.853,0.397 cw(c21.62,0.63) 21.62,0.3 ; 21.62,0.3 cw(c21.62,-0.03) 21.853,0.203 ccw(c21.62,-0.03) 21.62,0.3 ; v1@21.62,0.9 ccw(c21.62,1.23) 21.853,0.997 cw(c21.62,1.23) v1@21.62,0.9 ; v1@21.62,0.9 cw(c21.62,0.57) 21.853,0.803 ccw(c21.62,0.57) v1@21.62,0.9 ; 21.62,1.5 ccw(c21.62,1.83) 21.853,1.597 cw(c21.62,1.83) 21.62,1.5 ; 21.62,1.5 cw(c21.62,1.17) 21.853,1.403 ccw(c21.62,1.17) 21.62,1.5 ; v1@21.62,2.1 ccw(c21.62,2.43) 21.853,2.197 cw(c21.62,2.43) v1@21.62,2.1 ; v1@21.62,2.1 cw(c21.62,1.77) 21.853,2.003 ccw(c21.62,1.77) v1@21.62,2.1 ; 21.62,2.7 ccw(c21.62,3.03) 21.853,2.797 cw(c21.62,3.03) 21.62,2.7 ; 21.62,2.7 cw(c21.62,2.37) 21.853,2.603 ccw(c21.62,2.37) 21.62,2.7 ; v1@21.62,3.3 ccw(c21.62,3.63) 21.853,3.397 cw(c21.62,3.63) v1@21.62,3.3 ; v1@21.62,3.3 cw(c21.62,2.97) 21.853,3.203 ccw(c21.62,2.97) v1@21.62,3.3 ; 21.62,3.9 ccw(c21.62,4.23) 21.853,3.997 cw(c21.62,4.23) 21.62,3.9 ; 21.62,3.9 cw(c21.62,3.57) 21.853,3.803 ccw(c21.62,3.57) 21.62,3.9 ; v1@21.62,4.5 ccw(c21.62,4.83) 21.853,4.597 cw(c21.62,4.83) v1@21.62,4.5 ; v1@21.62,4.5 cw(c21.62,4.17) 21.853,4.403 ccw(c21.62,4.17) v1@21.62,4.5 ; 21.62,5.1 ccw(c21.62,5.43) 21.853,5.197 cw(c21.62,5.43) 21.62,5.1 ; 21.62,5.1 cw(c21.62,4.77) 21.853,5.003 ccw(c21.62,4.77) 21.62,5.1 ; v1@21.62,5.7 ccw(c21.62,6.03) 21.853,5.797 cw(c21.62,6.03) v1@21.62,5.7 ; v1@21.62,5.7 cw(c21.62,5.37) 21.853,5.603 ccw(c21.62,5.37) v1@21.62,5.7 ; 21.62,6.3 ccw(c21.62,6.63) 21.853,6.397 cw(c21.62,6.63) 21.62,6.3 ; 21.62,6.3 cw(c21.62,5.97) 21.853,6.203 ccw(c21.62,5.97) 21.62,6.3 ; v1@21.62,6.9 ccw(c21.62,7.23) 21.853,6.997 cw(c21.62,7.23) v1@21.62,6.9 ; v1@21.62,6.9 cw(c21.62,6.57) 21.853,6.803 ccw(c21.62,6.57) v1@21.62,6.9 ; 21.62,7.5 ccw(c21.62,7.83) 21.853,7.597 cw(c21.62,7.83) 21.62,7.5 ; 21.62,7.5 cw(c21.62,7.17) 21.853,7.403 ccw(c21.62,7.17) 21.62,7.5 ; v1@21.62,8.1 ccw(c21.62,8.43) 21.853,8.197 cw(c21.62,8.43) v1@21.62,8.1 ; v1@21.62,8.1 cw(c21.62,7.77) 21.853,8.003 ccw(c21.62,7.77) v1@21.62,8.1 ; 21.62,8.7 ccw(c21.62,9.03) 21.853,8.797 cw(c21.62,9.03) 21.62,8.7 ; 21.62,8.7 cw(c21.62,8.37) 21.853,8.603 ccw(c21.62,8.37) 21.62,8.7 ; v1@21.62,9.3 ccw(c21.62,9.63) 21.853,9.397 cw(c21.62,9.63) v1@21.62,9.3 ; v1@21.62,9.3 cw(c21.62,8.97) 21.853,9.203 ccw(c21.62,8.97) v1@21.62,9.3 ; 21.62,9.9 ccw(c21.62,10.23) 21.853,9.997 cw(c21.62,10.23) 21.62,9.9 ; 21.62,9.9 cw(c21.62,9.57) 21.853,9.803 ccw(c21.62,9.57) 21.62,9.9 ; v1@21.62,10.5 ccw(c21.62,10.83) 21.853,10.597 cw(c21.62,10.83) v1@21.62,10.5 ; v1@21.62,10.5 cw(c21.62,10.17) 21.853,10.403 ccw(c21.62,10.17) v1@21.62,10.5 ; 21.62,11.1 ccw(c21.62,11.43) 21.853,11.197 cw(c21.62,11.43) 21.62,11.1 ; 21.62,11.1 cw(c21.62,10.77) 21.853,11.003 ccw(c21.62,10.77) 21.62,11.1 ; v1@21.62,11.7 ccw(c21.62,12.03) 21.853,11.797 cw(c21.62,12.03) v1@21.62,11.7 ; v1@21.62,11.7 cw(c21.62,11.37) 21.853,11.603 ccw(c21.62,11.37) v1@21.62,11.7 ; 21.62,12.3 ccw(c21.62,12.63) 21.853,12.397 cw(c21.62,12.63) 21.62,12.3 ; 21.62,12.3 cw(c21.62,11.97) 21.853,12.203 ccw(c21.62,11.97) 21.62,12.3 ; v1@21.62,12.9 ccw(c21.62,13.23) 21.853,12.997 cw(c21.62,13.23) v1@21.62,12.9 ; v1@21.62,12.9 cw(c21.62,12.57) 21.853,12.803 ccw(c21.62,12.57) v1@21.62,12.9 ; 21.62,13.5 ccw(c21.62,13.83) 21.853,13.597 cw(c21.62,13.83) 21.62,13.5 ; 21.62,13.5 cw(c21.62,13.17) 21.853,13.403 ccw(c21.62,13.17) 21.62,13.5 ; v1@21.62,14.1 ccw(c21.62,14.43) 21.853,14.197 cw(c21.62,14.43) v1@21.62,14.1 ; v1@21.62,14.1 cw(c21.62,13.77) 21.853,14.003 ccw(c21.62,13.77) v1@21.62,14.1 ; 21.62,14.7 ccw(c21.62,15.03) 21.853,14.797 cw(c21.62,15.03) 21.62,14.7 ; 21.62,14.7 cw(c21.62,14.37) 21.853,14.603 ccw(c21.62,14.37) 21.62,14.7 ; P2-2.96@21.994,-13.5 ccw(c21.994,-14.071) 21.59,-13.667 cw(c21.994,-14.071) P2-2.96@21.994,-13.5 ; P2-2.96@21.994,-13.5 cw(c21.994,-12.929) 21.59,-13.333 ccw(c21.994,-12.929) P2-2.96@21.994,-13.5 ; P2-2.92@21.994,-12.3 ccw(c21.994,-12.871) 21.59,-12.467 cw(c21.994,-12.871) P2-2.92@21.994,-12.3 ; P2-2.92@21.994,-12.3 cw(c21.994,-11.729) 21.59,-12.133 ccw(c21.994,-11.729) P2-2.92@21.994,-12.3 ; P2-2.88@21.994,-11.1 ccw(c21.994,-11.671) 21.59,-11.267 cw(c21.994,-11.671) P2-2.88@21.994,-11.1 ; P2-2.88@21.994,-11.1 cw(c21.994,-10.529) 21.59,-10.933 ccw(c21.994,-10.529) P2-2.88@21.994,-11.1 ; P2-2.84@21.994,-9.9 ccw(c21.994,-10.471) 21.59,-10.067 cw(c21.994,-10.471) P2-2.84@21.994,-9.9 ; P2-2.84@21.994,-9.9 cw(c21.994,-9.329) 21.59,-9.733 ccw(c21.994,-9.329) P2-2.84@21.994,-9.9 ; P2-2.80@21.994,-8.7 ccw(c21.994,-9.271) 21.59,-8.867 cw(c21.994,-9.271) P2-2.80@21.994,-8.7 ; P2-2.80@21.994,-8.7 cw(c21.994,-8.129) 21.59,-8.533 ccw(c21.994,-8.129) P2-2.80@21.994,-8.7 ; P2-2.76@21.994,-7.5 ccw(c21.994,-8.071) 21.59,-7.667 cw(c21.994,-8.071) P2-2.76@21.994,-7.5 ; P2-2.76@21.994,-7.5 cw(c21.994,-6.929) 21.59,-7.333 ccw(c21.994,-6.929) P2-2.76@21.994,-7.5 ; P2-2.72@21.994,-6.3 ccw(c21.994,-6.871) 21.59,-6.467 cw(c21.994,-6.871) P2-2.72@21.994,-6.3 ; P2-2.72@21.994,-6.3 cw(c21.994,-5.729) 21.59,-6.133 ccw(c21.994,-5.729) P2-2.72@21.994,-6.3 ; P2-2.68@21.994,-5.1 ccw(c21.994,-5.671) 21.59,-5.267 cw(c21.994,-5.671) P2-2.68@21.994,-5.1 ; P2-2.68@21.994,-5.1 cw(c21.994,-4.529) 21.59,-4.933 ccw(c21.994,-4.529) P2-2.68@21.994,-5.1 ; P2-2.64@21.994,-3.9 ccw(c21.994,-4.471) 21.59,-4.067 cw(c21.994,-4.471) P2-2.64@21.994,-3.9 ; P2-2.64@21.994,-3.9 cw(c21.994,-3.329) 21.59,-3.733 ccw(c21.994,-3.329) P2-2.64@21.994,-3.9 ; P2-2.60@21.994,-2.7 ccw(c21.994,-3.271) 21.59,-2.867 cw(c21.994,-3.271) P2-2.60@21.994,-2.7 ; P2-2.60@21.994,-2.7 cw(c21.994,-2.129) 21.59,-2.533 ccw(c21.994,-2.129) P2-2.60@21.994,-2.7 ; P2-2.56@21.994,-1.5 ccw(c21.994,-2.071) 21.59,-1.667 cw(c21.994,-2.071) P2-2.56@21.994,-1.5 ; P2-2.56@21.994,-1.5 cw(c21.994,-0.929) 21.59,-1.333 ccw(c21.994,-0.929) P2-2.56@21.994,-1.5 ; P2-2.52@21.994,-0.3 ccw(c21.994,-0.871) 21.59,-0.467 cw(c21.994,-0.871) P2-2.52@21.994,-0.3 ; P2-2.52@21.994,-0.3 cw(c21.994,0.271) 21.59,-0.133 ccw(c21.994,0.271) P2-2.52@21.994,-0.3 ; P2-2.48@21.994,0.9 ccw(c21.994,0.329) 21.59,0.733 cw(c21.994,0.329) P2-2.48@21.994,0.9 ; P2-2.48@21.994,0.9 cw(c21.994,1.471) 21.59,1.067 ccw(c21.994,1.471) P2-2.48@21.994,0.9 ; P2-2.44@21.994,2.1 ccw(c21.994,1.529) 21.59,1.933 cw(c21.994,1.529) P2-2.44@21.994,2.1 ; P2-2.44@21.994,2.1 cw(c21.994,2.671) 21.59,2.267 ccw(c21.994,2.671) P2-2.44@21.994,2.1 ; P2-2.40@21.994,3.3 ccw(c21.994,2.729) 21.59,3.133 cw(c21.994,2.729) P2-2.40@21.994,3.3 ; P2-2.40@21.994,3.3 cw(c21.994,3.871) 21.59,3.467 ccw(c21.994,3.871) P2-2.40@21.994,3.3 ; P2-2.36@21.994,4.5 ccw(c21.994,3.929) 21.59,4.333 cw(c21.994,3.929) P2-2.36@21.994,4.5 ; P2-2.36@21.994,4.5 cw(c21.994,5.071) 21.59,4.667 ccw(c21.994,5.071) P2-2.36@21.994,4.5 ; P2-2.32@21.994,5.7 ccw(c21.994,5.129) 21.59,5.533 cw(c21.994,5.129) P2-2.32@21.994,5.7 ; P2-2.32@21.994,5.7 cw(c21.994,6.271) 21.59,5.867 ccw(c21.994,6.271) P2-2.32@21.994,5.7 ; P2-2.28@21.994,6.9 ccw(c21.994,6.329) 21.59,6.733 cw(c21.994,6.329) P2-2.28@21.994,6.9 ; P2-2.28@21.994,6.9 cw(c21.994,7.471) 21.59,7.067 ccw(c21.994,7.471) P2-2.28@21.994,6.9 ; P2-2.24@21.994,8.1 ccw(c21.994,7.529) 21.59,7.933 cw(c21.994,7.529) P2-2.24@21.994,8.1 ; P2-2.24@21.994,8.1 cw(c21.994,8.671) 21.59,8.267 ccw(c21.994,8.671) P2-2.24@21.994,8.1 ; P2-2.20@21.994,9.3 ccw(c21.994,8.729) 21.59,9.133 cw(c21.994,8.729) P2-2.20@21.994,9.3 ; P2-2.20@21.994,9.3 cw(c21.994,9.871) 21.59,9.467 ccw(c21.994,9.871) P2-2.20@21.994,9.3 ; P2-2.16@21.994,10.5 ccw(c21.994,9.929) 21.59,10.333 cw(c21.994,9.929) P2-2.16@21.994,10.5 ; P2-2.16@21.994,10.5 cw(c21.994,11.071) 21.59,10.667 ccw(c21.994,11.071) P2-2.16@21.994,10.5 ; P2-2.12@21.994,11.7 ccw(c21.994,11.129) 21.59,11.533 cw(c21.994,11.129) P2-2.12@21.994,11.7 ; P2-2.12@21.994,11.7 cw(c21.994,12.271) 21.59,11.867 ccw(c21.994,12.271) P2-2.12@21.994,11.7 ; P2-2.8@21.994,12.9 ccw(c21.994,12.329) 21.59,12.733 cw(c21.994,12.329) P2-2.8@21.994,12.9 ; P2-2.8@21.994,12.9 cw(c21.994,13.471) 21.59,13.067 ccw(c21.994,13.471) P2-2.8@21.994,12.9 ; P2-2.4@21.994,14.1 ccw(c21.994,13.529) 21.59,13.933 cw(c21.994,13.529) P2-2.4@21.994,14.1 ; P2-2.4@21.994,14.1 cw(c21.994,14.671) 21.59,14.267 ccw(c21.994,14.671) P2-2.4@21.994,14.1 ; P2-2.96@22.75,-13.5 22.8,-13.5 P2-2.96@22.75,-13.5 ; P2-2.92@22.75,-12.3 22.8,-12.3 P2-2.92@22.75,-12.3 ; P2-2.86@22.75,-10.5 22.8,-10.5 P2-2.86@22.75,-10.5
  other v1: -23.8,-21.35 -22.2,-21.35 -20.6,-21.35 -17.4,-21.35 -15.8,-21.35 -14.2,-21.35 14.2,-21.35 15.8,-21.35 17.4,-21.35 20.6,-21.35 22.2,-21.35 23.8,-21.35 -11,-19.7 -10.2,-19.7 7.9,-19.7 8.7,-19.7 2.4,-14.2 -4,-6 1,-6 -4,-5 -7,0 -3.7,12.2 -6.3,17 -23.8,19.85 -22.2,19.85 -20.6,19.85 -17.4,19.85 -15.8,19.85 -14.2,19.85 -9,19.85 -7.4,19.85 -5.8,19.85 -2.6,19.85 -1,19.85 0.6,19.85 17.4,19.85 19,19.85 22.2,19.85 23.8,19.85 -12.7,21
  other v2: -13.05,-17.2 -10.55,-17.15 -8.05,-17.1 -13.1,-14.7 -8.1,-14.6
  other v3: -4.8,-19.2 0,-19.2 4.8,-19.2
LED1: R1.2 U1.B2 | length 14
  Component Side w0.127: R1.2@-14,12.45 -14,11.6 ; U1.B2@-8.5,8.5 -8,9 -8,10.5 -8,10.9 -8,11 -8.1,11.1 -13.5,11.1 -14,11.6 ; -14,11.6 ccw(c-14.323,11.6) -14.208,11.902 cw(c-14.323,11.6) -14,11.6 ; -14,11.6 cw(c-13.677,11.6) -13.792,11.902 ccw(c-13.677,11.6) -14,11.6 ; -14,11.784 ccw(c-14.253,11.784) -14.163,12.02 cw(c-14.253,11.784) -14,11.784 ; -14,11.784 cw(c-13.747,11.784) -13.837,12.02 ccw(c-13.747,11.784) -14,11.784 ; -8.182,8.818 ccw(c-7.863,8.5) -8.313,8.5 cw(c-7.863,8.5) -8.182,8.818 ; -8.182,8.818 cw(c-8.5,9.137) -8.5,8.686 ccw(c-8.5,9.137) -8.182,8.818
LED2: R2.2 U1.A3 | length 11.4
  Component Side w0.127: R2.2@-12,12.45 -12,11.6 ; U1.A3@-7.5,9.5 -7.5,10.5 -7.5,10.9 -7.5,11.2 -7.7,11.4 -11.8,11.4 -12,11.6 ; -12,11.6 ccw(c-12.323,11.6) -12.208,11.902 cw(c-12.323,11.6) -12,11.6 ; -12,11.6 cw(c-11.677,11.6) -11.792,11.902 ccw(c-11.677,11.6) -12,11.6 ; -12,11.784 ccw(c-12.253,11.784) -12.163,12.02 cw(c-12.253,11.784) -12,11.784 ; -12,11.784 cw(c-11.747,11.784) -11.837,12.02 ccw(c-11.747,11.784) -12,11.784 ; -7.5,9.95 ccw(c-7.05,9.95) -7.368,9.632 cw(c-7.05,9.95) -7.5,9.95 ; -7.5,9.95 cw(c-7.95,9.95) -7.632,9.632 ccw(c-7.95,9.95) -7.5,9.95
NetC54_1: C54.1 SB1.1 VR2.2 | length 15.9
  Component Side w0.127: C54.1@6.5,-13.3 7.6,-13.3 ; 7.6,-13.3 cw(c7.6,-12.626) 6.931,-12.709 ccw(c7.6,-12.626) 7.6,-13.3 ; C54.1@6.301,-12.787 ccw(c6.881,-12.715) 6.881,-13.3 cw(c6.881,-12.715) C54.1@6.301,-12.787 ; C54.1@6.427,-12.772 ccw(c7.025,-12.697) 7.025,-13.3 cw(c7.025,-12.697) C54.1@6.427,-12.772 ; C54.1@6.553,-12.756 ccw(c7.169,-12.679) 7.169,-13.3 cw(c7.169,-12.679) C54.1@6.553,-12.756 ; C54.1@6.679,-12.74 ccw(c7.312,-12.662) 7.312,-13.3 cw(c7.312,-12.662) C54.1@6.679,-12.74 ; C54.1@6.805,-12.725 ccw(c7.456,-12.644) 7.456,-13.3 cw(c7.456,-12.644) C54.1@6.805,-12.725
  Solder Side w1: SB1.1@6.2,-17 v2@8,-17 ; 7.064,-17 cw(c7.064,-18.286) 7.973,-17.377 ccw(c7.064,-18.286) 7.064,-17
  other v1: 10.2,-19.7 11,-19.7
  other v2: 8.15,-17.2 10.65,-17.15 13.15,-17.1 8.1,-14.7 13.1,-14.6
NetD2_1: D2.1 R1.1 | length 15.4
  Component Side w0.2: R1.1@-14,14.35 D2.1@-14,16.05 ; R1.1@-14,14.722 ccw(c-15.328,14.722) -14.389,15.661 cw(c-15.328,14.722) R1.1@-14,14.722 ; R1.1@-14,14.722 cw(c-12.672,14.722) -13.611,15.661 ccw(c-12.672,14.722) R1.1@-14,14.722 ; -14,15.195 ccw(c-13.155,15.195) -13.753,14.597 cw(c-13.155,15.195) -14,15.195 ; -14,15.195 cw(c-14.845,15.195) -14.247,14.597 ccw(c-14.845,15.195) -14,15.195 ; -14,15.205 ccw(c-14.845,15.205) -14.247,15.803 cw(c-14.845,15.205) -14,15.205 ; -14,15.205 cw(c-13.155,15.205) -13.753,15.803 ccw(c-13.155,15.205) -14,15.205 ; D2.1@-14,15.678 ccw(c-12.672,15.678) -13.611,14.739 cw(c-12.672,15.678) D2.1@-14,15.678 ; D2.1@-14,15.678 cw(c-15.328,15.678) -14.389,14.739 ccw(c-15.328,15.678) D2.1@-14,15.678
NetD3_1: D3.1 R2.1 | length 15.4
  Component Side w0.2: R2.1@-12,14.35 D3.1@-12,16.05 ; R2.1@-12,14.722 ccw(c-13.328,14.722) -12.389,15.661 cw(c-13.328,14.722) R2.1@-12,14.722 ; R2.1@-12,14.722 cw(c-10.672,14.722) -11.611,15.661 ccw(c-10.672,14.722) R2.1@-12,14.722 ; -12,15.195 ccw(c-11.155,15.195) -11.753,14.597 cw(c-11.155,15.195) -12,15.195 ; -12,15.195 cw(c-12.845,15.195) -12.247,14.597 ccw(c-12.845,15.195) -12,15.195 ; -12,15.205 ccw(c-12.845,15.205) -12.247,15.803 cw(c-12.845,15.205) -12,15.205 ; -12,15.205 cw(c-11.155,15.205) -11.753,15.803 ccw(c-11.155,15.205) -12,15.205 ; D3.1@-12,15.678 ccw(c-10.672,15.678) -11.611,14.739 cw(c-10.672,15.678) D3.1@-12,15.678 ; D3.1@-12,15.678 cw(c-13.328,15.678) -12.389,14.739 ccw(c-13.328,15.678) D3.1@-12,15.678
NetD4_1: D4.1 R3.1 | length 15.3
  Component Side w0.2: R3.1@-10,14.4 D4.1@-10,16.05 ; R3.1@-10,14.722 ccw(c-11.328,14.722) -10.389,15.661 cw(c-11.328,14.722) R3.1@-10,14.722 ; R3.1@-10,14.722 cw(c-8.672,14.722) -9.611,15.661 ccw(c-8.672,14.722) R3.1@-10,14.722 ; -10,15.195 ccw(c-9.155,15.195) -9.753,14.597 cw(c-9.155,15.195) -10,15.195 ; -10,15.195 cw(c-10.845,15.195) -10.247,14.597 ccw(c-10.845,15.195) -10,15.195 ; -10,15.205 ccw(c-10.845,15.205) -10.247,15.803 cw(c-10.845,15.205) -10,15.205 ; -10,15.205 cw(c-9.155,15.205) -9.753,15.803 ccw(c-9.155,15.205) -10,15.205 ; D4.1@-10,15.678 ccw(c-8.672,15.678) -9.611,14.739 cw(c-8.672,15.678) D4.1@-10,15.678 ; D4.1@-10,15.678 cw(c-11.328,15.678) -10.389,14.739 ccw(c-11.328,15.678) D4.1@-10,15.678